# EAGLE board EEZ DIB v1.2 module dimensions (EAGLE 7.2.0)
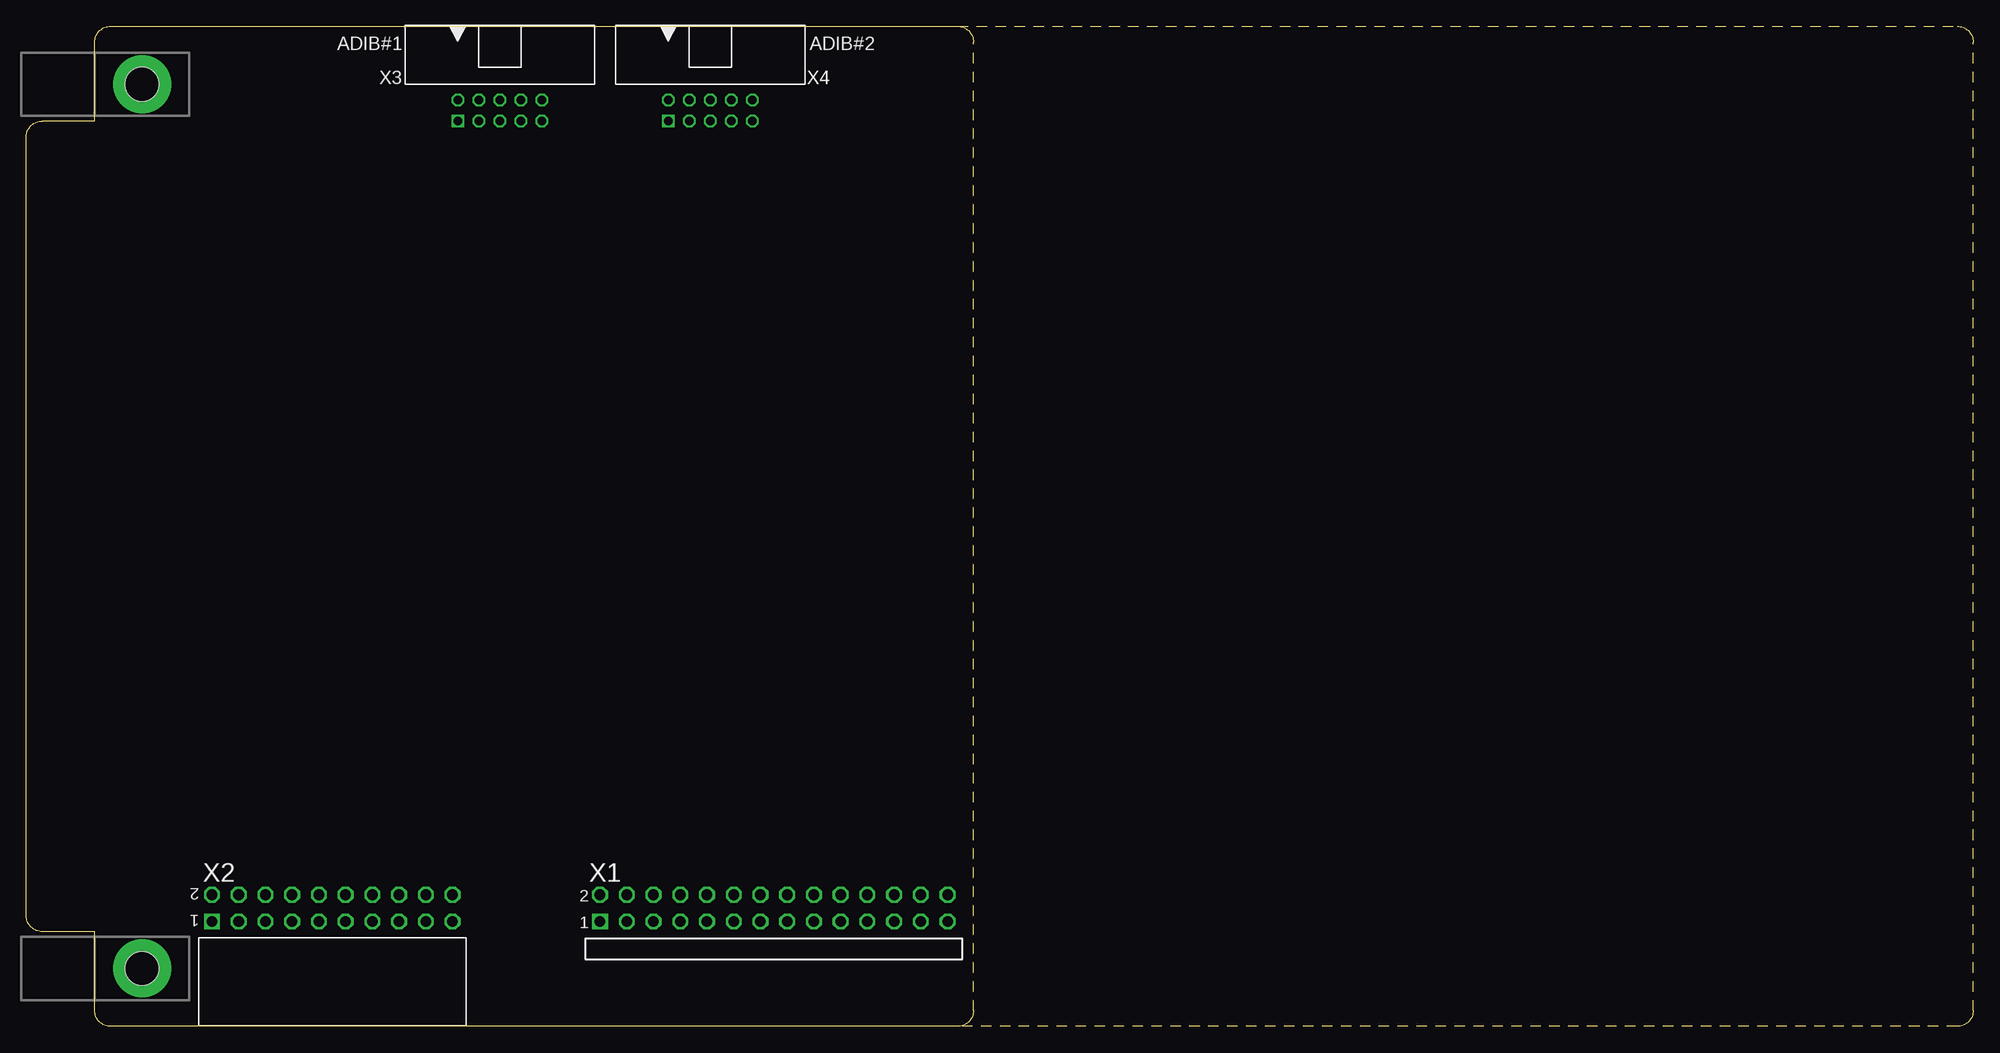
[diagram p0: board, top side]
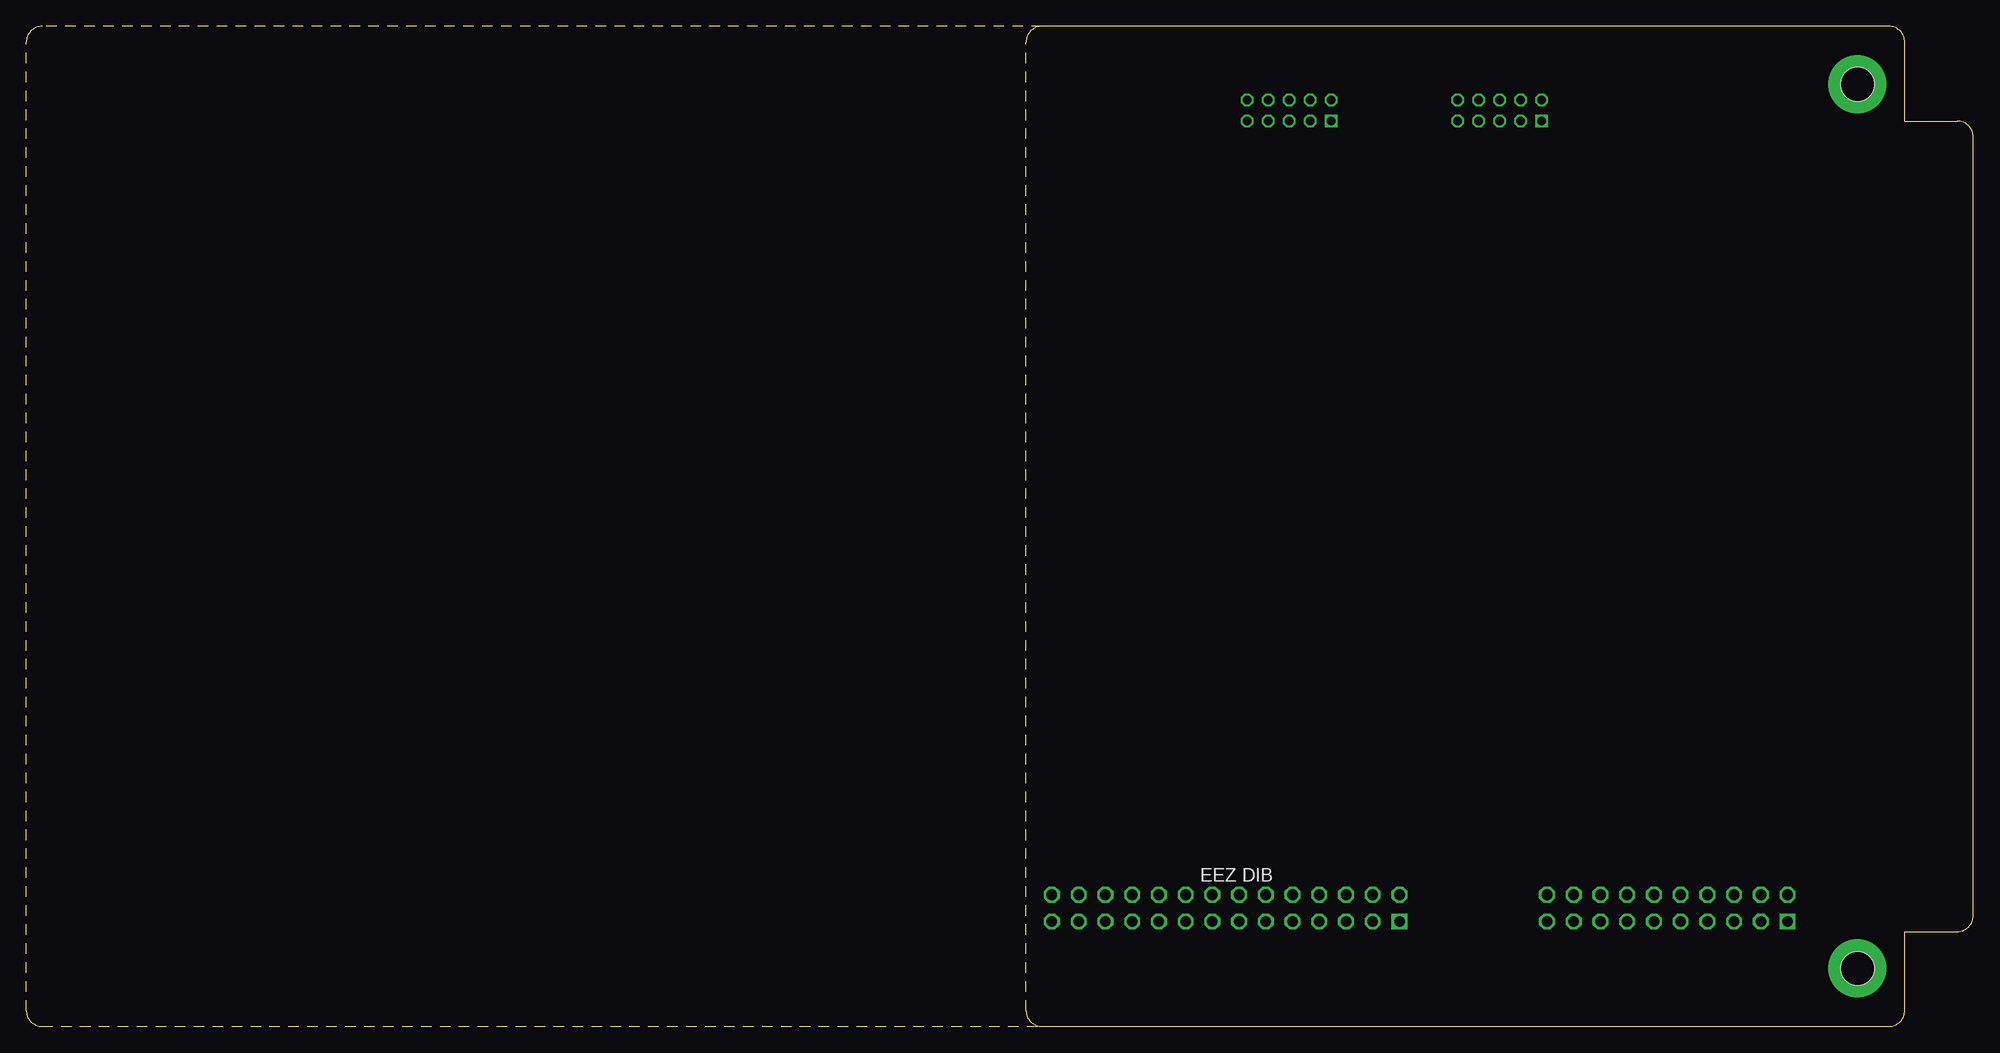
[diagram p1: board, bottom side, seen from below]

Size 185 x 95 mm. Coordinates in mm from the lower left corner, seen from the top.
Outline: 88.5,95 8,95 arc90 6.5,93.5 6.5,86 1.5,86 arc90 0,84.5 0,10.5 arc90 1.5,9 6.5,9 6.5,1.5 arc90 8,0 88.5,0
Outline: 88.5,95 183.5,95 arc-90 185,93.5 185,1.5 arc-90 183.5,0 88.5,0
Outline: 88.5,0 arc90 90,1.5 90,93.5 arc90 88.5,95
Copper layers (1*16): Top 0.035mm / dielectric 1.5mm / Bottom 0.035mm
Design rules "default *": minimum track width 6mil, minimum drill 0.3mm, track to track 6mil, track to pad 6mil, pad to pad 6mil, via to via 6mil, smd to smd 6mil, copper to edge 40mil, drill to drill 8mil, minimum pad ring 4mil, minimum via ring 8mil, stop-mask expansion 2.5mil, vias tented up to drill 1mm, thermal gap 8mil
Net classes: 0 default: width 0.203 mm, drill 0.3 mm, clearance 0.203 mm; 1 lvds: width 0.152 mm, drill 0.3 mm, clearance 0.152 mm to class 0, clearance 0.152 mm; 2 gnd: width 0.254 mm, drill 0.584 mm, clearance 0.254 mm
vRestrict: area 0,0 to 42,14; area 53,0 to 128,8.5

## Footprints (pad centres in the part's own frame; a part is rotated, then mirrored left to right if it is on the bottom)
PCB-MB = hole 3.2: 0,0
77317-104-28LF = drill 1 pad 1.5 square: 1 -33.02,-2.54 | drill 1 pad 1.5 octagon: 2 -33.02,0; 3 -30.48,-2.54; 4 -30.48,0; 5 -27.94,-2.54; 6 -27.94,0; 7 -25.4,-2.54; 8 -25.4,0; 9 -22.86,-2.54; 10 -22.86,0; 11 -20.32,-2.54; 12 -20.32,0; 13 -17.78,-2.54; 14 -17.78,0; 15 -15.24,-2.54; 16 -15.24,0; 17 -12.7,-2.54; 18 -12.7,0; 19 -10.16,-2.54; 20 -10.16,0; 21 -7.62,-2.54; 22 -7.62,0; 23 -5.08,-2.54; 24 -5.08,0; 25 -2.54,-2.54; 26 -2.54,0; 27 0,-2.54; 28 0,0
SSW-110-02-T-D-RA = drill 1 pad 1.5 square: 1 22.86,2.54 | drill 1 pad 1.5 octagon: 2 22.86,0; 3 20.32,2.54; 4 20.32,0; 5 17.78,2.54; 6 17.78,0; 7 15.24,2.54; 8 15.24,0; 9 12.7,2.54; 10 12.7,0; 11 10.16,2.54; 12 10.16,0; 13 7.62,2.54; 14 7.62,0; 15 5.08,2.54; 16 5.08,0; 17 2.54,2.54; 18 2.54,0; 19 0,2.54; 20 0,0
DS1014-10RF1B = drill 0.8 square: 1 -4,-1 | drill 0.8 octagon: 2 -4,1; 3 -2,-1; 4 -2,1; 5 0,-1; 6 0,1; 7 2,-1; 8 2,1; 9 4,-1; 10 4,1

## Placement (x,y rotation side)
KK1  PCB-MB  [PCB-MB]  11,89.5 0 top
KK2  PCB-MB  [PCB-MB]  11,5.5 0 top
X1  77317-104-28LF  [77317-104-28LF]  87.54,12.5 0 top
X2  ZL263-20DG  [SSW-110-02-T-D-RA]  40.5,12.5 180 top
X3  DS1014-10RF1B  [DS1014-10RF1B]  45,87 0 top
X4  DS1014-10RF1B  [DS1014-10RF1B]  65,87 0 top

## Library data of the parts
KK1 KK2 = EEZ_Lib1
X1-X4 = EEZ_connectors

## Tracks (layer width: path | path; a pad name or v marks a point on that pad's centre or on a via)
HOLE_DL  (via drill 3.2 pad 5.5)
  other vias: 11,5.5
HOLE_UL  (via drill 3.2 pad 5.5)
  other vias: 11,89.5

## Text on the board
tPlace: ADIB#1 | ADIB#2
bPlace: EEZ DIB
vRestrict: Restricted area (power relays) | Restricted area (DIB v1.2 and future expansion)
tDocu: Max. module width / (for EEZ BB3 chassis!) | Min. module width